# EAGLE board InkTime-pcb-Susai-Florian (EAGLE 9.7.0)
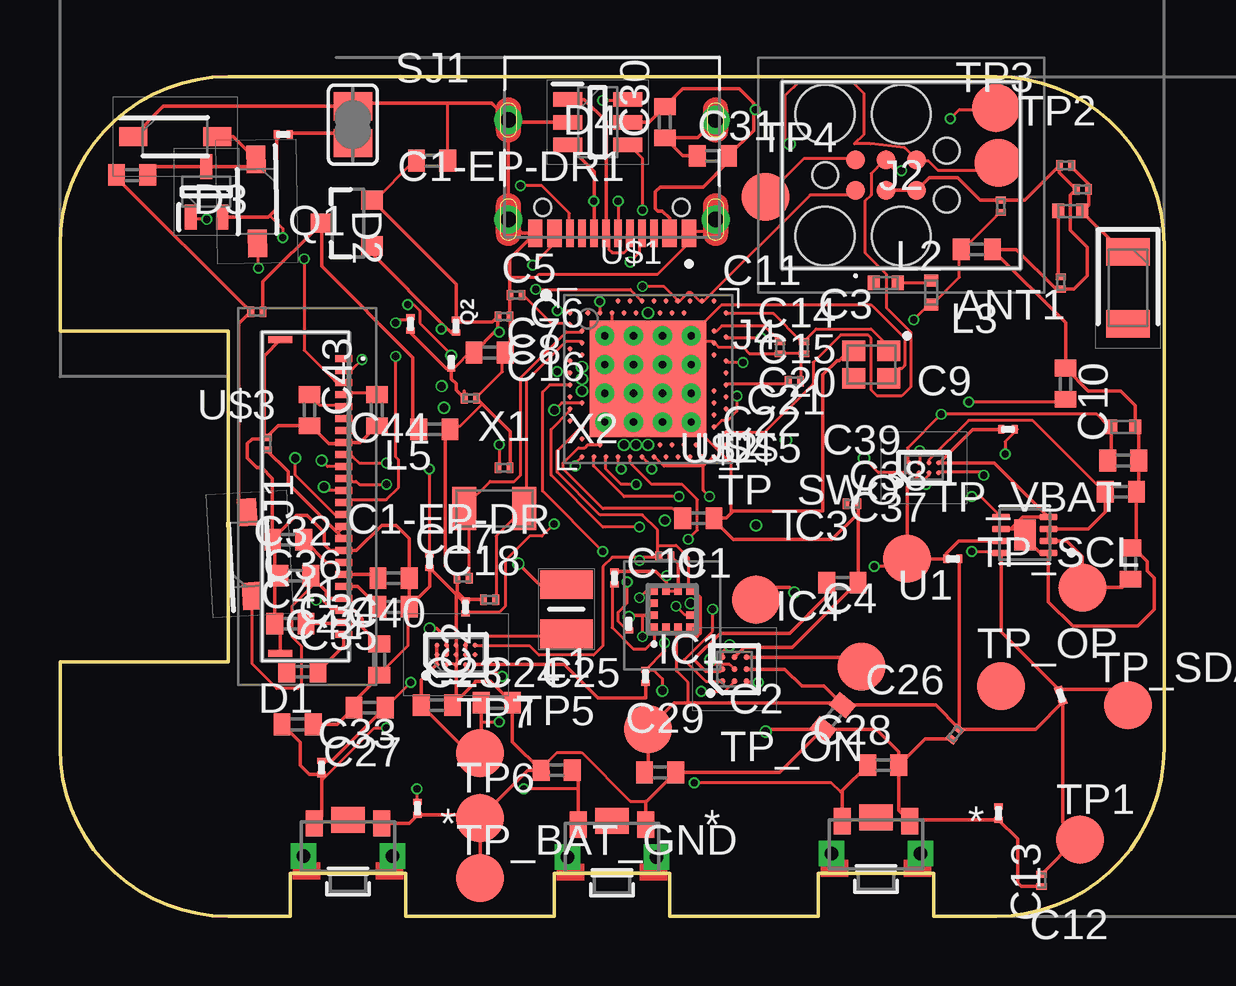
[diagram p0: board, top side]
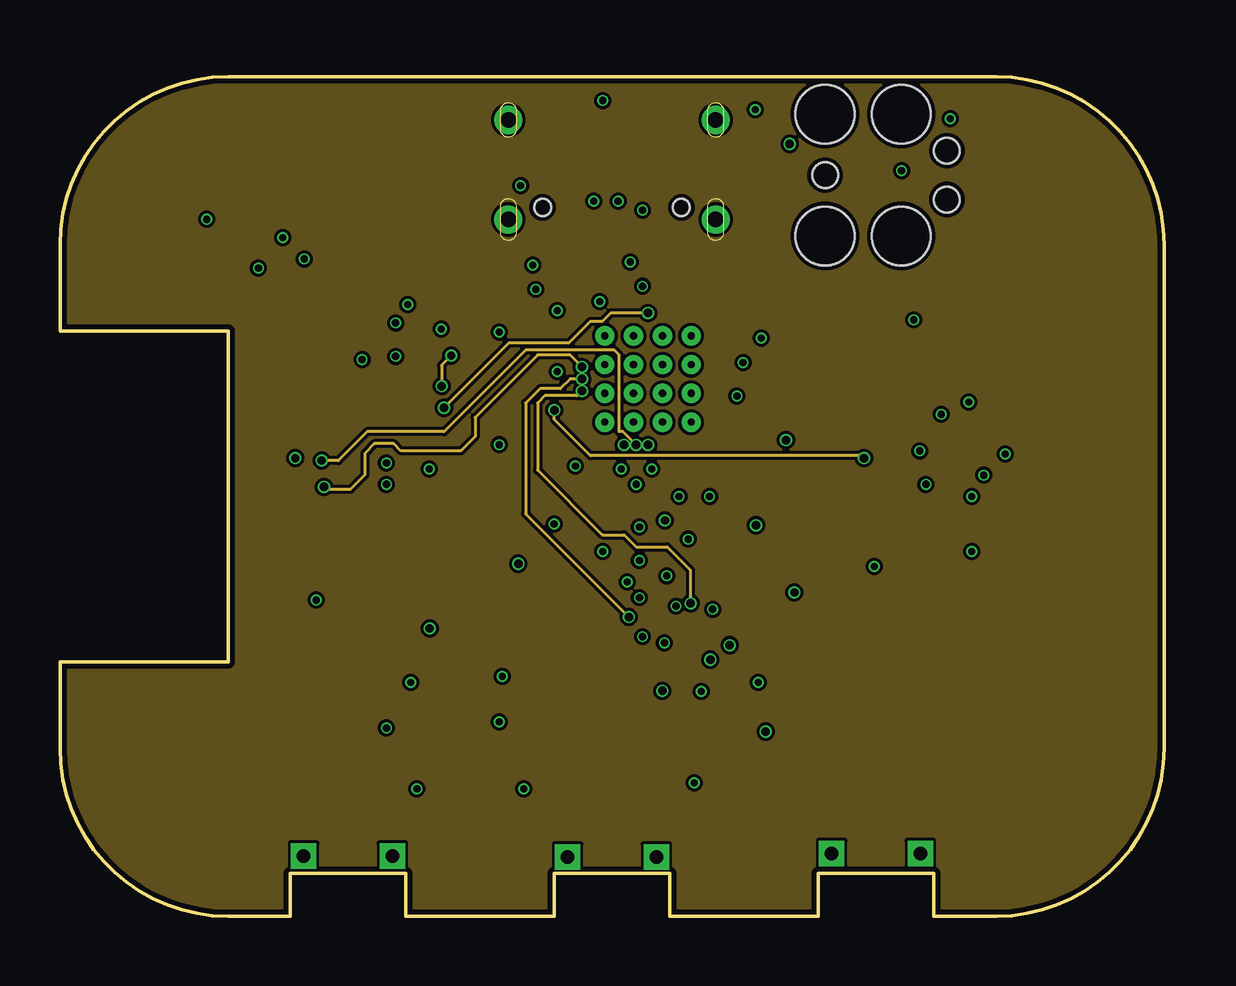
[diagram p1: board, inner layer Route2]
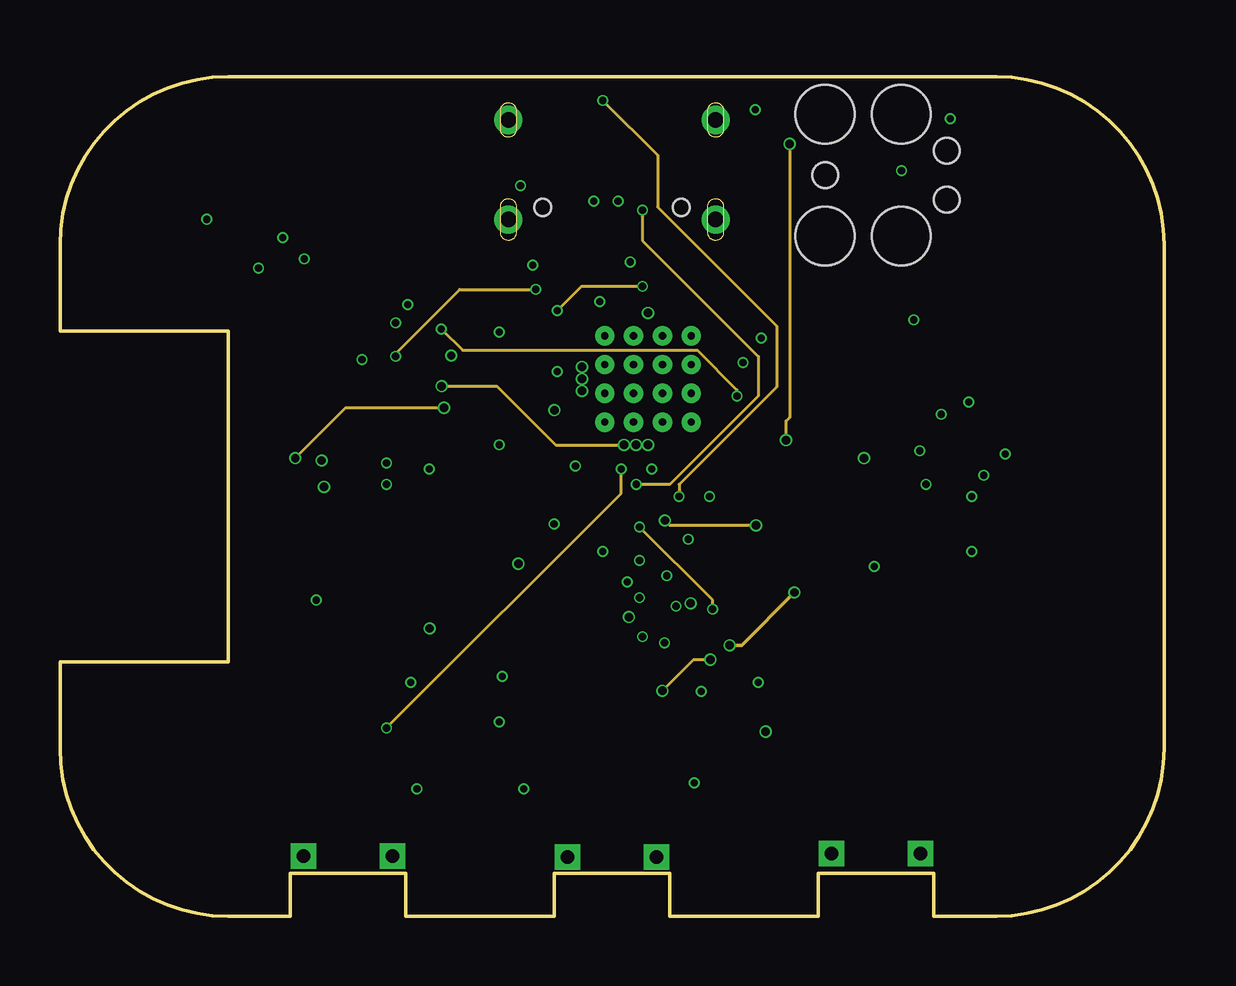
[diagram p2: board, inner layer Route15]
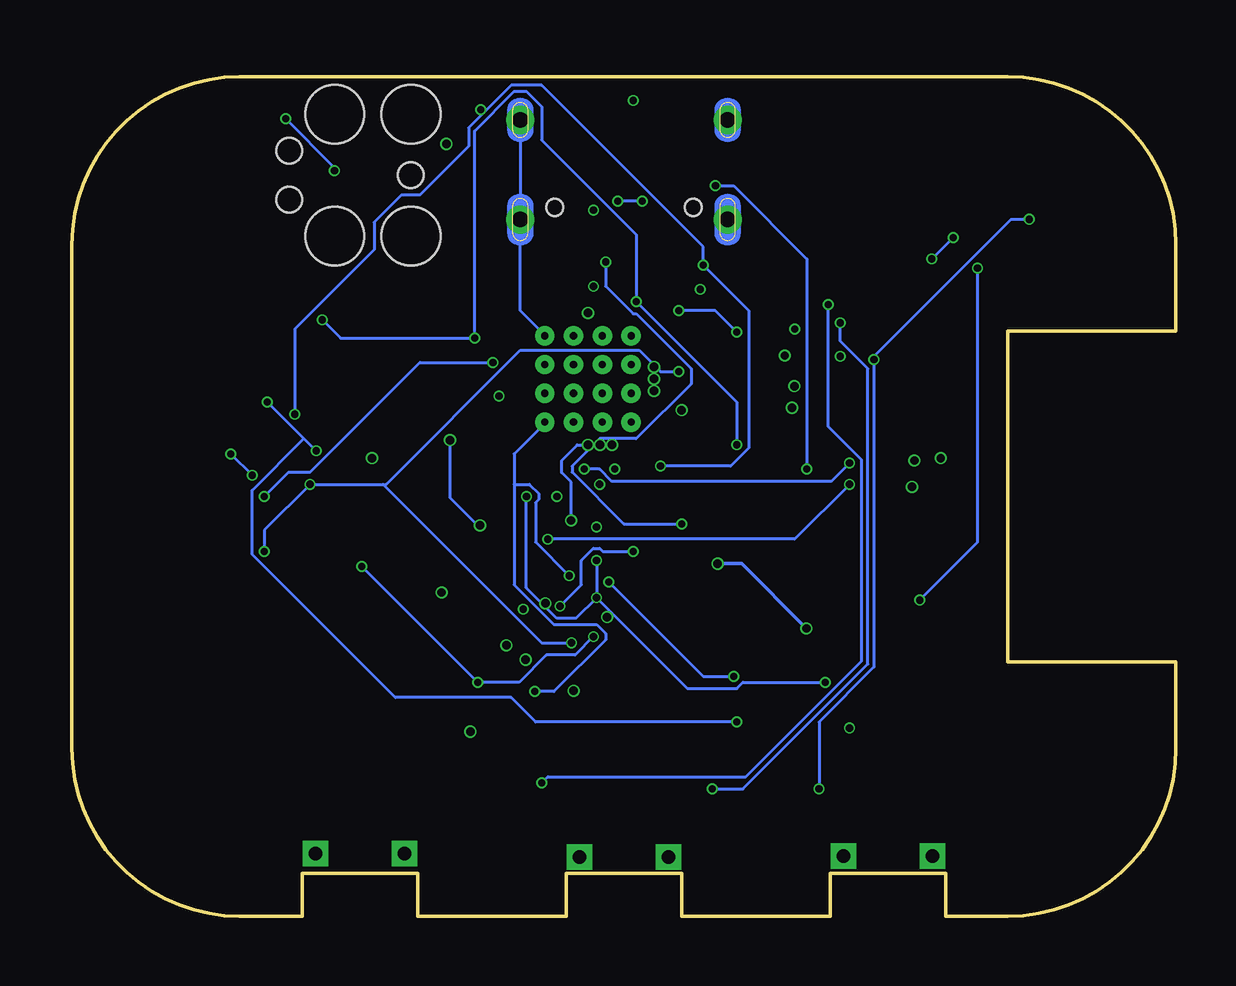
[diagram p3: board, bottom side, seen from below]

Size 46 x 35 mm. Coordinates in mm from the lower left corner, seen from the top.
Outline: 39,0 36.4,0 36.4,1.8 31.6,1.8 31.6,0 25.4,0 25.4,1.8 20.6,1.8 20.6,0 14.4,0 14.4,1.8 9.6,1.8 9.6,0 7,0 arc-90 0,7 0,10.6 7,10.6 7,24.4 0,24.4 0,28 arc-90 7,35 39,35 arc-90 46,28 46,7 arc-90 39,0
Copper layers (1*2*15*16): Top 0.035mm / dielectric 1mm / Route2 0.035mm / dielectric 0.15mm / Route15 0.035mm / dielectric 0.2mm / Bottom 0.035mm
Design rules "jlcpcb-2layers - Copy.dru *": minimum track width 5mil, minimum drill 0.3mm, track to track 5mil, track to pad 5mil, pad to pad 5mil, via to via 5mil, smd to smd 5mil, copper to edge 0.2mm, drill to drill 6mil, minimum pad ring 10mil, minimum via ring 3mil, stop-mask expansion 4mil, vias tented up to drill 0mil, thermal gap 10mil

## Footprints (pad centres in the part's own frame; a part is rotated, then mirrored left to right if it is on the bottom)
2450AT18B100E_ANTC3216X140N = smd 1.15 x 1.8: 1 -1.5,0; 2 1.5,0
NORDIC_NRF_3_RESC0201_L = smd 0.28 x 0.43: 1 -0.255,0; 2 0.255,0
ESP32_C6_LIBRARY_1_ESP32_WROVER_EAGLE-LTSPICE_C0402 = smd 0.7 x 0.9: 1 -0.65,0; 2 0.65,0
NORDIC_NRF_3_RESC0402_L = smd 0.5 x 0.6: 1 -0.5,0; 2 0.5,0
ESP32_C6_LIBRARY_5_SOD3716X135N = smd 1.15 x 0.8: 1 -1.75,0; 2 1.75,0
ESP32_C6_LIBRARY_3_SOT95P280X145-6N = smd 1.2 x 0.6: 1 -1.25,0.95; 2 -1.25,0; 3 -1.25,-0.95; 4 1.25,-0.95; 5 1.25,0; 6 1.25,0.95
BMA423_BMA423 = smd 0.3 x 0.35: 1 -0.75,-0.775; 2 -0.25,-0.775; 3 0.25,-0.775; 4 0.75,-0.775; 7 0.75,0.775; 8 0.25,0.775; 9 -0.25,0.775; 10 -0.75,0.775 | smd 0.35 x 0.3: 5 0.775,-0.25; 6 0.775,0.25; 11 -0.775,0.25; 12 -0.775,-0.25
RT6160AWSC_BGA15C40P3X5_140X230X60 = smd 0.216 x 0.216: A1 -0.4,0.8; A2 0,0.8; A3 0.4,0.8; B1 -0.4,0.4; B2 0,0.4; B3 0.4,0.4; C1 -0.4,0; C2 0,0; C3 0.4,0; D1 -0.4,-0.4; D2 0,-0.4; D3 0.4,-0.4; E1 -0.4,-0.8; E2 0,-0.8; E3 0.4,-0.8
BQ25180YBGR_BGA8C40P2X4_100X155X50 = smd 0.2 x 0.2: A1 -0.2,0.6; A2 0.2,0.6; B1 -0.2,0.2; B2 0.2,0.2; C1 -0.2,-0.2; C2 0.2,-0.2; D1 -0.2,-0.6; D2 0.2,-0.6
DRV2605YZFR_BGA9C50P3X3_144X144X62 = smd 0.25 x 0.25: A1 -0.5,0.5; A2 0,0.5; A3 0.5,0.5; B1 -0.5,0; B2 0,0; B3 0.5,0; C1 -0.5,-0.5; C2 0,-0.5; C3 0.5,-0.5
503480-2400_5034802400 = smd 0.3 x 0.7: 1 -5.75,1.525; 2 -5.25,1.525; 3 -4.75,1.525; 4 -4.25,1.525; 5 -3.75,1.525; 6 -3.25,1.525; 7 -2.75,1.525; 8 -2.25,1.525; 9 -1.75,1.525; 10 -1.25,1.525; 11 -0.75,1.525; 12 -0.25,1.525; 13 0.25,1.525; 14 0.75,1.525; 15 1.25,1.525; 16 1.75,1.525; 17 2.25,1.525; 18 2.75,1.525; 19 3.25,1.525; 20 3.75,1.525; 21 4.25,1.525; 22 4.75,1.525; 23 5.25,1.525; 24 5.75,1.525 | smd 0.3 x 1: MP1 -6.54,-1.125; MP2 6.54,-1.125
TC2030-IDC_TC2030IDC = smd 0.783 x 0.783: 1 -0.953,-0.635; 2 -0.953,0.635; 3 0.317,-0.635; 4 0.317,0.635; 5 1.588,-0.635; 6 1.588,0.635 | hole 2.451: -2.223,-2.54; -2.223,2.54; 0.952,-2.54; 0.952,2.54 | hole 1.067: -2.223,0; 2.857,-1.016; 2.857,1.016
KH-TYPE-C-16P_KINGHELM_KH-TYPE-C-16P = smd 0.6 x 1.15: A1_B12 -3.2,4.725; A4_B9 -2.4,4.725; A9_B4 2.4,4.725; A12_B1 3.2,4.725 | smd 0.3 x 1.15: A5 -1.25,4.725; A6 -0.25,4.725; A7 0.25,4.725; A8 1.25,4.725; B5 1.75,4.725; B6 0.75,4.725; B7 -0.75,4.725; B8 -1.75,4.725 | drill 0.65 pad 1.05: SH1 -4.32,0; SH2 4.32,0; SH3 -4.32,4.15; SH4 4.32,4.15 | hole 0.7: -2.89,3.65; 2.89,3.65
MLP2016SR47MT0S1_INDC2016X100N = smd 1.2 x 2.2: 1 -1.028,0; 2 1.028,0
NORDIC_NRF_2_RESC0402_L = smd 0.5 x 0.6: 1 -0.5,0; 2 0.5,0
NORDIC_NRF_2_RESC0201_L = smd 0.28 x 0.43: 1 -0.255,0; 2 0.255,0
ESP32_C6_LIBRARY_6_SOT65P210X110-3N = smd 1.05 x 0.5: 1 -1.05,0.65; 2 -1.05,-0.65; 3 1.05,0
ESP32_C6_LIBRARY_4_ESP32_C6_LIBRARY_4_ESP32_C6_LIBRARY_4_ESP32_C6_LIBRARY_4_ESP32_WROVER_SPARKFUN-DISCRETESEMI_SOT23-3 = smd 0.8 x 0.9: 1 -0.95,-1; 2 0.95,-1; 3 0,1.1
CPF0201D7K68C1_0201 = smd 0.35 x 0.25: 1 0,0.275; 2 0,-0.275
ESP32_C6_LIBRARY_7_JUMPER_SJ = smd 1.168 x 1.6: 1 -0.762,0; 2 0.762,0
2025-10-22_07-23-44_LIBRARY_SW_EVP-AKE31A_PAN = smd 0.711 x 1.092: 1 -1.4,-0.972; 2 1.4,-0.972 | drill 0.559 pad 0.914 square: 3 -1.848,0.381; 4 1.848,0.381 | smd 1.397 x 1.092: 5 0,-1.124
HECTOR_WATCH_1_TP20R = smd 2 x 2: TP 0,0
ESP32_C6_LIBRARY_SON50P200X200X80-9N = smd 0.76 x 0.27: 1 -0.985,0.75; 2 -0.985,0.25; 3 -0.985,-0.25; 4 -0.985,-0.75; 5 0.985,-0.75; 6 0.985,-0.25; 7 0.985,0.25; 8 0.985,0.75 | smd 0.9 x 1.3: 9 0,0
NORDIC_NRF_4_AQFN50P700X700X85_HS-74N = smd 4.85 x 4.85: P$74 0,0 | drill 0.3 pad 0.6: P$75 -1.8,1.8; P$76 -0.6,1.8; P$77 0.6,1.8; P$78 1.8,1.8; P$79 -1.8,0.6; P$80 -0.6,0.6; P$81 0.6,0.6; P$82 1.8,0.6; P$83 -1.8,-0.6; P$84 -0.6,-0.6; P$85 0.6,-0.6; P$86 1.8,-0.6; P$87 -1.8,-1.8; P$88 -0.6,-1.8; P$89 0.6,-1.8; P$90 1.8,-1.8 | smd 0.2 x 0.2: P$A8 -1.25,3.25; P$A10 -0.75,3.25; P$A12 -0.25,3.25; P$A14 0.25,3.25; P$A16 0.75,3.25; P$A18 1.25,3.25; P$A20 1.75,3.25; P$A22 2.25,3.25; P$A23 2.75,3.25; P$AA24 3.25,-2.25; P$AB2 -2.75,-2.5; P$AC5 -2,-2.75; P$AC9 -1,-2.75; P$AC11 -0.5,-2.75; P$AC13 0,-2.75; P$AC15 0.5,-2.75; P$AC17 1,-2.75; P$AC19 1.5,-2.75; P$AC21 2,-2.75; P$AC24 3.25,-2.75; P$AD2 -2.75,-3.25; P$AD4 -2.25,-3.25; P$AD6 -1.75,-3.25; P$AD8 -1.25,-3.25; P$AD10 -0.75,-3.25; P$AD12 -0.25,-3.25; P$AD14 0.25,-3.25; P$AD16 0.75,-3.25; P$AD18 1.25,-3.25; P$AD20 1.75,-3.25; P$AD22 2.25,-3.25; P$AD23 2.75,-3.25; P$B1 -3.25,2.75; P$B3 -2.5,2.75; P$B5 -2,2.75; P$B7 -1.5,2.75; P$B9 -1,2.75; P$B11 -0.5,2.75; P$B13 0,2.75; P$B15 0.5,2.75; P$B17 1,2.75; P$B19 1.5,2.75; P$B24 3.25,2.75; P$C1 -3.25,2.25; P$D2 -2.75,2; P$D23 2.75,2; P$E24 3.25,1.75; P$F2 -2.75,1.5; P$F23 2.75,1.5; P$G1 -3.25,1.25; P$H2 -2.75,1; P$H23 2.75,1; P$J1 -3.25,0.75; P$J24 3.25,0.75; P$K2 -2.75,0.5; P$L1 -3.25,0.25; P$L24 3.25,0.25; P$M2 -2.75,0; P$N1 -3.25,-0.25; P$N24 3.25,-0.25; P$P2 -2.75,-0.5; P$P23 2.75,-0.5; P$R1 -3.25,-0.75; P$R24 3.25,-0.75; P$T2 -2.75,-1; P$T23 2.75,-1; P$U1 -3.25,-1.25; P$U24 3.25,-1.25; P$V23 2.75,-1.5; P$W1 -3.25,-1.75; P$W24 3.25,-1.75; P$Y2 -2.75,-2; P$Y23 2.75,-2
NORDIC_NRF_BT-XTAL_2016_N = smd 0.95 x 0.85: 1 -0.725,-0.575; 2 0.725,-0.575; 3 0.725,0.575; 4 -0.725,0.575
NORDIC_NRF_1_XTAL_3215_N = smd 1 x 1.8: 1 -1.25,0; 2 1.25,0

## Placement (x,y rotation side)
ANT1  2450AT18B100E_2450AT18B100E  [2450AT18B100E_ANTC3216X140N]  44.5,26.2 270 top
C1  1pF  [NORDIC_NRF_3_RESC0201_L]  42.6,30.3 180 top
C1-EP-DR  10uF  [ESP32_C6_LIBRARY_1_ESP32_WROVER_EAGLE-LTSPICE_C0402]  15.6,20.3 0 top
C1-EP-DR1  4.7uF/25V  [ESP32_C6_LIBRARY_1_ESP32_WROVER_EAGLE-LTSPICE_C0402]  3,30.9 180 top
C2  0.1uF  [ESP32_C6_LIBRARY_1_ESP32_WROVER_EAGLE-LTSPICE_C0402]  32.2,8.3 230.9 top
C3  1pF  [NORDIC_NRF_3_RESC0201_L]  41.7,26.4 270 top
C4  1uF  [ESP32_C6_LIBRARY_1_ESP32_WROVER_EAGLE-LTSPICE_C0402]  32.6,13.9 0 top
C5  100nF  [NORDIC_NRF_3_RESC0201_L]  19,25.9 180 top
C6  4.7µF  [ESP32_C6_LIBRARY_1_ESP32_WROVER_EAGLE-LTSPICE_C0402]  17.9,23.5 0 top
C7  100nF  [NORDIC_NRF_3_RESC0201_L]  17.1,21.6 0 top
C8  100nF  [NORDIC_NRF_3_RESC0201_L]  18.5,25 0 top
C9  820pF  [NORDIC_NRF_3_RESC0201_L]  30.6,22.3 0 top
C10  N.C.  [NORDIC_NRF_3_RESC0201_L]  39.2,29.6 90 top
C11  100pF  [NORDIC_NRF_3_RESC0201_L]  30,23.7 270 top
C12  100nF  [NORDIC_NRF_3_RESC0201_L]  40.9,1.5 270 top
C13  N.C.  [NORDIC_NRF_3_RESC0201_L]  37.3,7.6 232.1 top
C14  4.7µF  [ESP32_C6_LIBRARY_1_ESP32_WROVER_EAGLE-LTSPICE_C0402]  15.5,31.5 0 top
C15  1.0µF  [ESP32_C6_LIBRARY_1_ESP32_WROVER_EAGLE-LTSPICE_C0402]  38.2,27.8 0 top
C16  47nF  [NORDIC_NRF_3_RESC0201_L]  18.5,18.7 0 top
C17  12pF  [NORDIC_NRF_3_RESC0201_L]  16.8,14.1 0 top
C18  12pF  [NORDIC_NRF_3_RESC0201_L]  17.9,13.2 0 top
C19  100nF  [NORDIC_NRF_3_RESC0201_L]  25.2,15 0 top
C20  4.7µF  [ESP32_C6_LIBRARY_1_ESP32_WROVER_EAGLE-LTSPICE_C0402]  26.6,16.6 0 top
C21  4.7µF  [NORDIC_NRF_3_RESC0402_L]  44.3,20.4 0 top
C22  N.C.  [NORDIC_NRF_3_RESC0201_L]  41.9,31.3 180 top
C23  0.1uF  [ESP32_C6_LIBRARY_1_ESP32_WROVER_EAGLE-LTSPICE_C0402]  15.7,8.8 0 top
C24  10uF  [ESP32_C6_LIBRARY_1_ESP32_WROVER_EAGLE-LTSPICE_C0402]  18.2,8.9 0 top
C25  22uF  [ESP32_C6_LIBRARY_1_ESP32_WROVER_EAGLE-LTSPICE_C0402]  25,6 0 top
C26  0.1uF  [ESP32_C6_LIBRARY_1_ESP32_WROVER_EAGLE-LTSPICE_C0402]  44.6,14.7 90 top
C27  1uF  [ESP32_C6_LIBRARY_1_ESP32_WROVER_EAGLE-LTSPICE_C0402]  9.9,8 0 top
C28  1uF  [ESP32_C6_LIBRARY_1_ESP32_WROVER_EAGLE-LTSPICE_C0402]  34.3,6.3 0 top
C29  1uF  [ESP32_C6_LIBRARY_1_ESP32_WROVER_EAGLE-LTSPICE_C0402]  20.69,6.09 180.6 top
C30  4.7uF  [ESP32_C6_LIBRARY_1_ESP32_WROVER_EAGLE-LTSPICE_C0402]  25.2,33.1 90 top
C31  0.1uF  [ESP32_C6_LIBRARY_1_ESP32_WROVER_EAGLE-LTSPICE_C0402]  27.2,31.7 0 top
C32  1uF/50V  [ESP32_C6_LIBRARY_1_ESP32_WROVER_EAGLE-LTSPICE_C0402]  9.5,15.7 0 top
C33  22uF  [ESP32_C6_LIBRARY_1_ESP32_WROVER_EAGLE-LTSPICE_C0402]  12.9,8.7 180 top
C34  1uF/50V  [ESP32_C6_LIBRARY_1_ESP32_WROVER_EAGLE-LTSPICE_C0402]  13.9,14.1 180 top
C35  1uF/50V  [ESP32_C6_LIBRARY_1_ESP32_WROVER_EAGLE-LTSPICE_C0402]  13.9,12.9 180 top
C36  1uF/50V  [ESP32_C6_LIBRARY_1_ESP32_WROVER_EAGLE-LTSPICE_C0402]  9.8,14.2 0 top
C37  1uF  [ESP32_C6_LIBRARY_1_ESP32_WROVER_EAGLE-LTSPICE_C0402]  44.2,17.7 0 top
C38  1uF  [ESP32_C6_LIBRARY_1_ESP32_WROVER_EAGLE-LTSPICE_C0402]  44.3,19 0 top
C39  10uF  [ESP32_C6_LIBRARY_1_ESP32_WROVER_EAGLE-LTSPICE_C0402]  41.9,22.2 90 top
C40  1uF/50V  [ESP32_C6_LIBRARY_1_ESP32_WROVER_EAGLE-LTSPICE_C0402]  13.3,10.7 90 top
C41  1uF/50V  [ESP32_C6_LIBRARY_1_ESP32_WROVER_EAGLE-LTSPICE_C0402]  9.6,12.2 0 top
C42  1uF/50V  [ESP32_C6_LIBRARY_1_ESP32_WROVER_EAGLE-LTSPICE_C0402]  10.1,10.2 0 top
C43  1uF/50V  [ESP32_C6_LIBRARY_1_ESP32_WROVER_EAGLE-LTSPICE_C0402]  13.2,21.1 90 top
C44  1uF/50V  [ESP32_C6_LIBRARY_1_ESP32_WROVER_EAGLE-LTSPICE_C0402]  10.4,21.1 90 top
D1  ESP32_C6_LIBRARY_5_MBR0530  [ESP32_C6_LIBRARY_5_SOD3716X135N]  7.9,15.1 93.3 top
D2  ESP32_C6_LIBRARY_5_MBR0530  [ESP32_C6_LIBRARY_5_SOD3716X135N]  8.2,29.8 271 top
D3  ESP32_C6_LIBRARY_5_MBR0530  [ESP32_C6_LIBRARY_5_SOD3716X135N]  4.8,32.5 0 top
D4  ESP32_C6_LIBRARY_3_USBLC6-2SC6Y  [ESP32_C6_LIBRARY_3_SOT95P280X145-6N]  22.4,33.1 0 top
IC1  BMA423_BMA423  [BMA423_BMA423]  25.5,12.8 0 top
IC2  RT6160AWSC_RT6160AWSC  [RT6160AWSC_BGA15C40P3X5_140X230X60]  16.5,10.9 90 top
IC3  BQ25180YBGR_BQ25180YBGR  [BQ25180YBGR_BGA8C40P2X4_100X155X50]  36,18.7 90 top
IC4  DRV2605YZFR_DRV2605YZFR  [DRV2605YZFR_BGA9C50P3X3_144X144X62]  28.1,10.3 90 top
J1  503480-2400_503480-2400  [503480-2400_5034802400]  10.3,17.5 270 top
J2  TC2030-IDC_TC2030-IDC  [TC2030-IDC_TC2030IDC]  34.1,30.9 0 top
J4  KH-TYPE-C-16P_KH-TYPE-C-16P  [KH-TYPE-C-16P_KINGHELM_KH-TYPE-C-16P]  23,33.2 180 top
L1  MLP2016SR47MT0S1_FTC252012SR47MBCA  [MLP2016SR47MT0S1_INDC2016X100N]  21.1,12.8 270 top
L2  10µH  [NORDIC_NRF_2_RESC0402_L]  34.4,26.4 0 top
L3  10µH  [NORDIC_NRF_2_RESC0402_L]  36.3,26 270 top
L5  68uH  [NORDIC_NRF_2_RESC0201_L]  8.2,25.2 180 top
Q1  ESP32_C6_LIBRARY_6_SI1308EDL-T1-GE3  [ESP32_C6_LIBRARY_6_SOT65P210X110-3N]  6.1,30.2 90 top
Q2  20V/4.2A/52mΩ/1.4W  [ESP32_C6_LIBRARY_4_ESP32_C6_LIBRARY_4_ESP32_C6_LIBRARY_4_ESP32_C6_LIBRARY_4_ESP32_WROVER_SPARKFUN-DISCRETESEMI_SOT23-3]  12,28.9 90 top
R1  0  [CPF0201D7K68C1_0201]  24.4,10 0 top
R2  0  [CPF0201D7K68C1_0201]  23.7,12.2 0 top
R3  0  [CPF0201D7K68C1_0201]  23.1,14.1 0 top
R4  3K3  [CPF0201D7K68C1_0201]  37.2,14.9 270 top
R5  3K3  [CPF0201D7K68C1_0201]  41.7,9.2 198.5 top
R6  0.47  [CPF0201D7K68C1_0201]  9.3,32.6 270 top
R7  2.2  [CPF0201D7K68C1_0201]  39.1,4.3 180 top
R8  10K  [CPF0201D7K68C1_0201]  14.9,4.5 180 top
R9  10K  [CPF0201D7K68C1_0201]  39.5,20.3 90 top
R10  10K  [CPF0201D7K68C1_0201]  10.9,6.2 180 top
R11  10K  [CPF0201D7K68C1_0201]  16.3,23.1 0 top
R12  10K  [CPF0201D7K68C1_0201]  14.6,24.7 0 top
R13  10K  [CPF0201D7K68C1_0201]  16.9,12.9 0 top
R14  10K  [CPF0201D7K68C1_0201]  15.4,14.8 0 top
R16  10K  [CPF0201D7K68C1_0201]  16.5,24.6 180 top
SJ1  0  [ESP32_C6_LIBRARY_7_JUMPER_SJ]  12.2,33 270 top
SW1  2025-10-22_07-23-44_LIBRARY_EVP-AKE31ASW_EVP-AKE31A_PAN  [2025-10-22_07-23-44_LIBRARY_SW_EVP-AKE31A_PAN]  12,2.9 180 top
SW2  2025-10-22_07-23-44_LIBRARY_EVP-AKE31ASW_EVP-AKE31A_PAN  [2025-10-22_07-23-44_LIBRARY_SW_EVP-AKE31A_PAN]  34,3 180 top
SW3  2025-10-22_07-23-44_LIBRARY_EVP-AKE31ASW_EVP-AKE31A_PAN  [2025-10-22_07-23-44_LIBRARY_SW_EVP-AKE31A_PAN]  23,2.85 180 top
TP1  HECTOR_WATCH_1_TPTP20R  [HECTOR_WATCH_1_TP20R]  42.5,3.2 0 top
TP2  HECTOR_WATCH_1_TPTP20R  [HECTOR_WATCH_1_TP20R]  39.1,31.4 0 top
TP3  HECTOR_WATCH_1_TPTP20R  [HECTOR_WATCH_1_TP20R]  39,33.7 0 top
TP4  HECTOR_WATCH_1_TPTP20R  [HECTOR_WATCH_1_TP20R]  29.4,30 180 top
TP5  HECTOR_WATCH_1_TPTP20R  [HECTOR_WATCH_1_TP20R]  24.5,7.8 0 top
TP6  HECTOR_WATCH_1_TPTP20R  [HECTOR_WATCH_1_TP20R]  17.5,4.1 0 top
TP7  HECTOR_WATCH_1_TPTP20R  [HECTOR_WATCH_1_TP20R]  17.5,6.8 0 top
TP_BAT_GND  HECTOR_WATCH_1_TPTP20R  [HECTOR_WATCH_1_TP20R]  17.5,1.6 0 top
TP_ON  HECTOR_WATCH_1_TPTP20R  [HECTOR_WATCH_1_TP20R]  33.4,10.4 0 top
TP_OP  HECTOR_WATCH_1_TPTP20R  [HECTOR_WATCH_1_TP20R]  29,13.2 0 top
TP_SCL  HECTOR_WATCH_1_TPTP20R  [HECTOR_WATCH_1_TP20R]  35.3,14.9 0 top
TP_SDA  HECTOR_WATCH_1_TPTP20R  [HECTOR_WATCH_1_TP20R]  44.5,8.8 0 top
TP_SWO  HECTOR_WATCH_1_TPTP20R  [HECTOR_WATCH_1_TP20R]  39.2,9.6 0 top
TP_VBAT  HECTOR_WATCH_1_TPTP20R  [HECTOR_WATCH_1_TP20R]  42.6,13.7 0 top
U1  ESP32_C6_LIBRARY_MAX17048G+T10  [ESP32_C6_LIBRARY_SON50P200X200X80-9N]  40.2,15.9 180 top
U$1  NORDIC_NRF_4_NRF52840_QF  [NORDIC_NRF_4_AQFN50P700X700X85_HS-74N]  24.5,22.4 0 top
U$2  3.9nH  [NORDIC_NRF_2_RESC0402_L]  42.1,29.4 0 top
U$3  1uF/50V  [NORDIC_NRF_3_RESC0201_L]  8.6,19.7 270 top
U$4  12pF  [NORDIC_NRF_3_RESC0201_L]  31,23.7 270 top
U$5  12pF  [NORDIC_NRF_3_RESC0201_L]  33,17.2 0 top
X1  32MHz  [NORDIC_NRF_BT-XTAL_2016_N]  33.8,23 180 top
X2  32.768kHz  [NORDIC_NRF_1_XTAL_3215_N]  18.1,17 0 top

## Library data of the parts
ANT1 = dan-tudose-lib; ARROW_PART_NUMBER: 2450AT18B100E; ARROW_PRICE-STOCK: https://www.arrow.com/en/products/2450at18b100e/johanson-dielectrics?utm_currency=USD&region=nac; DESCRIPTION: Antennas 2.45GHz ANTENNA; HEIGHT: 1.4mm; MANUFACTURER_NAME: JOHANSON TECHNOLOGY; MANUFACTURER_PART_NUMBER: 2450AT18B100E; MOUSER_PART_NUMBER: 609-2450AT18B100E; MOUSER_PRICE-STOCK: https://www.mouser.co.uk/ProductDetail/Johanson-Technology/2450AT18B100E?qs=yCnrNFeXz%252Bh5MFsFIXGZGA%3D%3D
C1 C3 C5 C7-C13 C16-C19 C21 C22 L2 L3 L5 R1-R14 R16 SJ1 TP1-TP7 TP_BAT_GND TP_ON TP_OP TP_SCL TP_SDA TP_SWO TP_VBAT U$1-U$5 X1 X2 = dan-tudose-lib
C1-EP-DR C1-EP-DR1 C2 C4 C6 C14 C15 C20 C23-C44 = dan-tudose-lib; SPICEMODEL: NONE; SPICEPREFIX: C
D1-D3 = dan-tudose-lib; AVAILABILITY: In Stock; CHECK_PRICES: https://www.snapeda.com/parts/MBR0530/Onsemi/view-part/?ref=eda; DESCRIPTION: Diode Schottky 30 V 500mA Surface Mount SOD-123; MF: ON Semiconductor; MP: MBR0530; PACKAGE: SOD-123-2 ON Semiconductor; PRICE: None; PURCHASE-URL: https://www.snapeda.com/api/url_track_click_mouser/?unipart_id=179458&manufacturer=ON Semiconductor&part_name=MBR0530&search_term=None; SNAPEDA_LINK: https://www.snapeda.com/parts/MBR0530/Onsemi/view-part/?ref=snap
D4 = dan-tudose-lib; AVAILABILITY: In Stock; CHECK_PRICES: https://www.snapeda.com/parts/USBLC6-2SC6Y/STMicroelectronics/view-part/?ref=eda; DESCRIPTION: 17V Clamp 5A (8/20µs) Ipp Tvs Diode Surface Mount SOT-23-6; MF: STMicroelectronics; MP: USBLC6-2SC6Y; PACKAGE: SOT-23-6 STMicroelectronics; PRICE: None; SNAPEDA_LINK: https://www.snapeda.com/parts/USBLC6-2SC6Y/STMicroelectronics/view-part/?ref=snap
IC1 = dan-tudose-lib; ARROW_PART_NUMBER: BMA423; ARROW_PRICE-STOCK: https://www.arrow.com/en/products/bma423/bosch; DESCRIPTION: Accelerometers Triaxial low-g 12bit Acceleration Sensor; HEIGHT: 1mm; MANUFACTURER_NAME: BOSCH; MANUFACTURER_PART_NUMBER: BMA423; MOUSER_PART_NUMBER: 262-BMA423; MOUSER_PRICE-STOCK: https://www.mouser.co.uk/ProductDetail/Bosch-Sensortec/BMA423?qs=HXFqYaX1Q2xC%252BSgeGoX3mg%3D%3D
IC2 = dan-tudose-lib; DESCRIPTION: Buck-Boost Regulator Positive Output Step-Up/Step-Down I2C DC-DC Controller IC 15-WL-CSP (BSC) (1.4x2.3); HEIGHT: 0.6mm; MANUFACTURER_NAME: RICHTEK; MANUFACTURER_PART_NUMBER: RT6160AWSC; MOUSER_PART_NUMBER: 835-RT6160AWSC; MOUSER_PRICE-STOCK: https://www.mouser.co.uk/ProductDetail/Richtek/RT6160AWSC?qs=amGC7iS6iy%2FLd9PSoixZXQ%3D%3D
IC3 = dan-tudose-lib; ARROW_PART_NUMBER: BQ25180YBGR; ARROW_PRICE-STOCK: https://www.arrow.com/en/products/bq25180ybgr/texas-instruments?utm_currency=USD&region=nac; DESCRIPTION: Charger IC Lithium Ion/Polymer, Lithium Iron Phosphate 8-DSBGA (1.6x1.1); HEIGHT: 0.5mm; MANUFACTURER_NAME: Texas Instruments; MANUFACTURER_PART_NUMBER: BQ25180YBGR; MOUSER_PART_NUMBER: 595-BQ25180YBGR; MOUSER_PRICE-STOCK: https://www.mouser.co.uk/ProductDetail/Texas-Instruments/BQ25180YBGR?qs=doiCPypUmgEWjAK%252BJAX6Tw%3D%3D
IC4 = dan-tudose-lib; ARROW_PART_NUMBER: DRV2605YZFR; ARROW_PRICE-STOCK: https://www.arrow.com/en/products/drv2605yzfr/texas-instruments?region=nac; DESCRIPTION: Haptic Driver for ERM/LRA with Built-In Library and Smart Loop Architecture; HEIGHT: 0.625mm; MANUFACTURER_NAME: Texas Instruments; MANUFACTURER_PART_NUMBER: DRV2605YZFR
J1 = dan-tudose-lib; DESCRIPTION: FFC & FPC Connectors 0.5mm FPC RA SMT Dual Contact 24Ckt; HEIGHT: 1.87mm; MANUFACTURER_NAME: Molex; MANUFACTURER_PART_NUMBER: 503480-2400; MOUSER_PART_NUMBER: 538-503480-2400; MOUSER_PRICE-STOCK: https://www.mouser.co.uk/ProductDetail/Molex/503480-2400?qs=OAhjpuo3Vu7efIoxFh9AOw%3D%3D
J2 = dan-tudose-lib; DESCRIPTION: CABLE ADAPTER 6 POS; HEIGHT: 19mm; MANUFACTURER_NAME: Tag Connect; MANUFACTURER_PART_NUMBER: TC2030-IDC
J4 = dan-tudose-lib; AVAILABILITY: Not in stock; CHECK_PRICES: https://www.snapeda.com/parts/KH-TYPE-C-16P/Kinghelm/view-part/?ref=eda; MF: kinghelm; MP: KH-TYPE-C-16P; PACKAGE: None; PRICE: None; SNAPEDA_LINK: https://www.snapeda.com/parts/KH-TYPE-C-16P/Kinghelm/view-part/?ref=snap
L1 = dan-tudose-lib; DESCRIPTION: SMD / SMT Inductors (Coils), L=0.47?H, L x W x T :; HEIGHT: 1mm; JLCPCB: https://jlcpcb.com/partdetail/6763488-FTC252012SR47MBCA/C5832368; MANUFACTURER_NAME: TDK; MANUFACTURER_PART_NUMBER: FTC252012SR47MBCA
Q1 = dan-tudose-lib; AVAILABILITY: In Stock; CHECK_PRICES: https://www.snapeda.com/parts/SI1308EDL-T1-GE3/Vishay+Siliconix/view-part/?ref=eda; DESCRIPTION: Si1308EDL-T1-GE3 N-channel MOSFET Transistor, 1.5 A, 30 V, 3-Pin SC-70 | Siliconix / Vishay SI1308EDL-T1-GE3; MF: Vishay Siliconix; MP: SI1308EDL-T1-GE3; PACKAGE: SOT-323 Vishay Semiconductor; PRICE: None; PURCHASE-URL: https://www.snapeda.com/api/url_track_click_mouser/?unipart_id=274603&manufacturer=Vishay Siliconix&part_name=SI1308EDL-T1-GE3&search_term=None; SNAPEDA_LINK: https://www.snapeda.com/parts/SI1308EDL-T1-GE3/Vishay+Siliconix/view-part/?ref=snap
Q2 = dan-tudose-lib; PROD_ID: TRAN-14388
SW1-SW3 = dan-tudose-lib; COPYRIGHT: Copyright (C) 2025 Ultra Librarian. All rights reserved.; DIGI-KEY_PART_NUMBER_1: P123437TR-ND; DIGI-KEY_PART_NUMBER_2: P123437CT-ND; DIGI-KEY_PART_NUMBER_3: P123437DKR-ND; MANUFACTURER_NAME: Panasonic; MANUFACTURER_PART_NUMBER: EVP-AKE31A
U1 = dan-tudose-lib; AVAILABILITY: In Stock; CHECK_PRICES: https://www.snapeda.com/parts/MAX17048G+T10/Analog+Devices/view-part/?ref=eda; DESCRIPTION: 3µA 1-Cell/2-Cell Fuel Gauge with ModelGauge; MF: Analog Devices; MP: MAX17048G+T10; PACKAGE: TDFN-8 Maxim; PRICE: None; PURCHASE-URL: https://www.snapeda.com/api/url_track_click_mouser/?unipart_id=329239&manufacturer=Analog Devices&part_name=MAX17048G+T10&search_term=None; SNAPEDA_LINK: https://www.snapeda.com/parts/MAX17048G+T10/Analog+Devices/view-part/?ref=snap

## Nets
3V3: C2.1 C12.1 C13.1 C19.1 C25.1 C33.1 IC1.3 IC1.7 IC1.10 IC2.E3 IC4.C2 R4.1 R5.1 R10.2 TP1.TP TP5.TP U$1.P$AD14 U$1.P$AD23 U$1.P$Y2
ALERT: U1.5 U$1.P$J24
D+: D4.4 U$1.P$AD6
D-: D4.6 U$1.P$AD4
DEC3: C11.1 U$1.P$D23
DEC4_6: C10.1 C15.1 C16.1 L3.2 U$1.P$B5 U$1.P$E24
DN: D4.1 J4.A7 J4.B7
DP: D4.3 J4.A6 J4.B6
EPD: J1.15 J1.16 U$3.2
EPD_3V3: C1-EP-DR.1 L5.1 Q2.3
EPD_BUSY: J1.9 U$1.P$AD12
EPD_CS: J1.12 U$1.P$K2
EPD_DC: J1.11 U$1.P$AD10
EPD_RST: J1.10 U$1.P$AC11
GDR: J1.2 Q1.1 R8.2
GND: C1-EP-DR.2 C2.2 C4.2 C5.2 C6.2 C7.2 C8.2 C9.2 C11.2 C12.2 C13.2 C14.2 C16.2 C17.1 C18.1 C19.2 C20.2 C23.2 C24.2 C25.2 C27.2 C28.2 C29.2 C30.1 C31.1 C32.1 C33.2 C34.1 C35.1 C36.1 C40.1 C41.1 C43.1 C44.1 D3.1 D4.2 IC1.8 IC1.9 IC2.B1 IC2.C1 IC2.C2 IC2.C3 IC4.B1 IC4.B3 J1.8 J1.17 J1.MP1 J1.MP2 J4.A1_B12 J4.A12_B1 J4.SH1 J4.SH2 J4.SH3 J4.SH4 R3.1 R7.1 R8.1 R13.1 R14.2 SJ1.1 SW1.1 SW2.1 SW3.1 TP6.TP TP_BAT_GND.TP U$1.P$74 U$1.P$75 U$1.P$76 U$1.P$77 U$1.P$78 U$1.P$79 U$1.P$80 U$1.P$81 U$1.P$82 U$1.P$83 U$1.P$84 U$1.P$85 U$1.P$86 U$1.P$87 U$1.P$88 U$1.P$89 U$1.P$90 U$1.P$B7 U$1.P$F23 U$3.1 U$4.2 U$5.2 X1.2 X1.4
GND3: IC1.1 R3.2
HAPTIC_EN: IC4.A1 U$1.P$U1
IMU_INT1: IC1.5 U$1.P$N1
IMU_INT2: IC1.6 U$1.P$P2
LX1: IC2.B2 IC2.B3 L1.1
LX2: IC2.D2 IC2.D3 L1.2
MOSI: J1.14 U$1.P$B13
N$1: C5.1 U$1.P$C1
N$3: C20.1 U$1.P$AC5
N$4: ANT1.1 C1.1 C22.1 U$2.2
N$5: C3.1 U$2.1
N$6: L2.2 L3.1
N$10: IC2.D1 R2.2
N$11: C1-EP-DR1.2 D1.2 L5.2
N$12: IC2.E1 R1.2
N$13: C1-EP-DR1.1 D2.1 D3.2 Q1.3
N$14: C9.1 U$1.P$N24
N$16: IC3.D1 R9.2
N$21: U$1.P$B24 U$4.1 X1.1
N$22: R6.1 SJ1.2
N$30: C4.1 IC4.A2
N$45: J4.A5 R13.2
N$52: J4.B5 R14.1
N$59: C43.2 J1.4
N$60: C44.2 J1.5
N$70: C32.2 J1.18
N$71: C34.2 J1.19
N$72: C35.2 J1.20
N$76: C41.2 J1.23
N$78: C42.2 J1.24
OUT+: IC4.A3 TP_OP.TP
OUT-: IC4.C3 TP_ON.TP
P0.00/XL1: C17.2 U$1.P$D2 X2.1
P0.00/XL2: C18.2 U$1.P$F2 X2.2
P0.04: U$1.P$J1
P0.09: U$1.P$L24
P0.13: C27.1 R10.1 SW1.2 U$1.P$AD8
P0.14: C28.1 R11.1 SW2.2 U$1.P$AC9
P0.19: U$1.P$AC15
P0.20: U$1.P$AD16
P0.21: U$1.P$AC17
P0.22: U$1.P$AD18
P0.23: U$1.P$AC19
P0.24: U$1.P$AD20
P0.25: U$1.P$AC21
P0.26: U$1.P$G1
P0.27: U$1.P$H2
P0.28: U$1.P$B11
P0.29: U$1.P$A10
P0.30: U$1.P$B9
P0.31: U$1.P$A8
P1.01: Q2.1 R16.1 U$1.P$W24 U$1.P$Y23
P1.02: C29.1 R12.1 SW3.2
P1.03: U$1.P$V23
P1.04: U$1.P$U24
P1.05: U$1.P$T23
P1.06: U$1.P$R24
P1.07: U$1.P$P23
P1.09: U$1.P$R1
P1.10: U$1.P$A20
P1.11: U$1.P$B19
P1.12: U$1.P$B17
P1.13: U$1.P$A16
P1.14: U$1.P$B15
P1.15: U$1.P$A14
PMIC_INT: IC3.A1 U$1.P$T2
PREVGH: C36.2 D1.1 J1.21
PREVGL: C40.2 D2.2 J1.22
RESE: J1.3 Q1.2 R6.2
RESET: J2.6 TP2.TP U$1.P$AC13
S$2: C1.2 C3.2 C10.2 C15.2 C21.2 C22.2 C26.2 C37.2 C38.2 C39.2 IC3.D2 J2.3 J2.5 R9.1 U1.1 U1.4 U1.6 U1.9
S$3: C6.1 C7.1 C8.1 C14.1 J2.1 Q2.2 R11.2 R12.2 R16.2 U$1.P$A18 U$1.P$A22 U$1.P$B1
S$4: U$1.P$B3
S$5: U$1.P$A23
SCK: J1.13 U$1.P$A12
SCL: IC1.12 IC3.B1 IC4.C1 R2.1 R4.2 TP_SCL.TP U1.7 U$1.P$M2
SDA: IC1.2 IC3.C1 IC4.B2 R1.1 R5.2 TP_SDA.TP U1.8 U$1.P$L1
SWDCLK: J2.4 TP3.TP U$1.P$AA24
SWDIO: J2.2 TP4.TP
VBAT: C26.1 C37.1 IC3.C2 TP_VBAT.TP U1.2 U1.3
VBUS: C21.1 C30.2 C31.2 C38.1 D4.5 IC3.A2 J4.A4_B9 J4.A9_B4 U$1.P$AD2
VREG: C23.1 C24.1 C39.1 IC2.A1 IC2.A2 IC2.A3 IC3.B2 TP7.TP

## Tracks (layer width: path | path; a pad name or v marks a point on that pad's centre or on a via)
3V3  (via drill 0.3)
  Top 0.127: 25.79,11.66 25.79,11.91 IC1.3 | 26.18,8.86 26.18,8.9 26.18,9.74 25.69,10.22 25.69,11.66 25.79,11.66 | 26.81,18.77 25.16,18.77 24.78,19.15 U$1.P$AD14 | 26.81,18.77 27.19,19.15 U$1.P$AD23 | 24.91,15.47 24.91,15.09 C19.1 24.91,14.96 24.14,14.96 | 24.91,15.47 24.91,16.1 24.27,16.74 22.49,16.74 20.71,18.52 20.71,19.41 21.73,20.42 U$1.P$Y2 | 24.14,14.96 23,14.96 22.62,14.58 22.62,11.28 22.24,10.9 19.95,10.9 19.57,11.28 17.29,11.28 IC2.E3 | v24.14,13.28 24.42,13.56 24.65,13.56 IC1.10 | 24.14,14.96 v24.14,14.83 | 24.91,15.47 25.67,15.47 26.18,14.96 26.18,13.69 IC1.7 26.3,13.69 26.68,13.31 26.68,11.79 26.56,11.66 25.79,11.66 | 26.81,18.77 26.81,17.75 v27.06,17.5 | v14.62,9.75 13.6,8.74 C33.1
  Top 0.152: R10.2 11.32,6.47 C33.1 | C12.1 42.34,3.2 TP1.TP 41.79,3.91 R5.1 40.65,7.8 C13.1 37.48,7.82 | R4.1 37.48,7.82 | C2.1 36.49,8.8 37.48,7.82 | C25.1 24.5,6.15 TP5.TP 25.6,8.9 26.18,8.9 32.51,8.9 C2.1 | C2.1 31.81,9.6 30.9,9.6 30.2,10.3 IC4.C2
  Bottom 0.127: v24.14,14.83 v24.14,13.28 | v27.06,17.5 27.06,13.69 25.79,12.42 25,12.42 v24.14,13.28 | v14.62,9.75 18.05,9.75 18.3,9.5 20.36,9.5 v24.14,13.28
ALERT  (via drill 0.3)
  Top 0.127: v28.46,23.09 27.83,23.09 U$1.P$J24 | v37.99,17.5 38.37,17.5 39.13,16.74 U1.5
  Bottom 0.127: v28.46,23.09 31.51,23.09 36.08,18.52 36.97,18.52 v37.99,17.5
D+  (via drill 0.3)
  Top 0.127: v24.02,18.01 23.38,18.01 22.75,18.64 U$1.P$AD6 | v24.27,29.44 24.27,31.6 23.76,32.11 D4.4
  Route15 0.127: v24.02,18.01 25.41,18.01 29.1,21.69 29.1,23.34 24.27,28.17 v24.27,29.44
D-  (via drill 0.3)
  Top 0.127: v25.79,17.5 23.51,17.5 22.24,18.77 22.24,19.15 U$1.P$AD4 | v22.62,34.01 23.64,34.01 D4.6
  Route15 0.127: v25.79,17.5 25.79,18.01 29.86,22.07 29.86,24.61 24.91,29.56 24.91,31.72 v22.62,34.01
DEC3
  Top 0.127: U$1.P$D23 27.32,24.36 27.57,24.61 29.35,24.61 29.98,23.98 C11.1
DEC4_6  (via drill 0.3)
  Top 0.127: C10.1 39.13,29.31 37.61,27.79 C15.1 37.48,27.79 37.48,26.64 36.34,25.5 L3.2 36.21,25.5 v35.57,24.87 | v29.22,24.1 27.83,24.1 U$1.P$E24 | v22.49,25.63 22.49,25.25 U$1.P$B5 | v18.3,19.66 18.3,18.77 C16.1
  Bottom 0.127: v35.57,24.87 34.81,24.1 v29.22,24.1 29.22,32.74 27.57,34.39 27.06,34.39 26.43,33.76 26.43,32.36 22.49,28.42 v22.49,25.63 18.3,21.44 v18.3,19.66
DN
  Top 0.127: J4.B7 23.64,28.42 23.64,27.79 23.51,27.66 23,27.66 22.87,27.79 22.87,28.42 J4.A7
  Top 0.152: D4.1 21.85,34.05 22.75,33.15 J4.A7
DP  (via drill 0.3)
  Top 0.127: v23.25,29.82 23.25,28.55 J4.A6 | v22.24,29.82 v22.25,29.82
  Top 0.152: D4.3 22.25,31.05 v22.25,29.82 J4.B6
  Bottom 0.127: v22.24,29.82 v23.25,29.82
EPD
  Top 0.127: 11.57,15.98 11.82,16.23 J1.15
  Top 0.152: J1.16 11.79,15.75 11.57,15.98 9.5,18.05 9.5,18.55 U$3.2
EPD_3V3
  Top 0.152: L5.1 8.46,26.45 Q2.3 10.9,27.1 14.7,23.3 14.7,20.3 C1-EP-DR.1
EPD_BUSY  (via drill 0.3)
  Top 0.127: v24.65,18.64 24.65,18.77 24.27,19.15 U$1.P$AD12 | v13.6,18.9 12.46,18.9 12.21,19.15 11.95,19.15 J1.9
  Bottom 0.127: v24.65,18.64 24.02,18.64 23.51,18.14 14.36,18.14 v13.6,18.9
EPD_CS  (via drill 0.35)
  Top 0.127: J1.12 11.15,17.75 v11,17.9
  Route2 0.127: U$1.P$K2 21.25,23.4 19.9,23.4 17.3,20.8 17.3,20 16.7,19.4 14.2,19.4 13.9,19.7 13.1,19.7 12.7,19.3 12.7,18.4 12.1,17.8 11.1,17.8 v11,17.9
  other vias: 21.75,22.9
EPD_DC  (via drill 0.3)
  Top 0.127: v26.18,15.72 26.56,16.1 26.56,17.37 25.92,18.01 24.65,18.01 23.76,18.9 23.76,19.15 U$1.P$AD10 | v13.6,18.01 12.46,18.01 12.33,18.14 11.95,18.14 J1.11
  Bottom 0.127: v26.18,15.72 15.89,15.72 v13.6,18.01
EPD_RST  (via drill 0.35)
  Top 0.127: J1.10 11.15,18.75 v10.9,19
  Route2 0.127: U$1.P$AC11 23.45,20.2 23.3,20.2 23.3,23.4 23.1,23.6 19.4,23.6 16,20.2 12.8,20.2 11.6,19 v10.9,19
  other vias: 24,19.65
GDR  (via drill 0.3)
  Top 0.127: v14.87,5.31 14.87,4.8 R8.2 | v12.59,23.21 12.21,22.83 11.95,22.83 J1.2 | v6.11,29.06 5.47,29.06 Q1.1
  Bottom 0.127: v14.87,5.31 14.87,8.1 12.59,10.39 v12.59,23.21 12.59,23.34 6.87,29.06 v6.11,29.06
GND  (via drill 0.3, 0.35)
  Top 0.127: IC1.8 25.67,13.56 25.29,13.56 IC1.9 | v26.72,9.37 27.7,9.37 28.08,9.75 IC4.B1 | v25.29,14.2 25.14,14.06 | J4.SH3 27.32,28.93 26.94,28.55 26.3,28.55 J4.A1_B12 26.18,28.42 26.18,28.04 24.91,26.77 19.95,26.77 19.82,26.64 18.75,26.64 | C9.2 30.87,22.33 30.87,23.34 U$4.2 30.87,23.47 30.11,23.47 C11.2 29.98,23.47 28.71,23.47 28.46,23.72 27.45,23.72 27.32,23.85 U$1.P$F23 27.19,23.98 26.43,23.98 26.3,24.1 U$1.P$74 | U$1.P$B7 23,24.48 22.75,24.23 | 26.3,24.23 27.57,25.5 33.8,25.5 35.19,24.1 35.19,22.96 35.06,22.83 34.94,22.83 34.56,22.45 X1.4 | 22.75,21.69 22.75,20.68 U$1.P$87 | 22.75,21.69 U$1.P$83 | 22.75,21.69 U$1.P$74 | U$1.P$79 22.75,23.09 23.25,23.6 23.25,23.72 U$1.P$74 | 22.75,24.23 U$1.P$75 | 22.75,24.23 U$1.P$74 | U$1.P$88 23.89,20.68 23.89,21.69 U$1.P$74 | U$1.P$84 24.02,21.82 U$1.P$74 | U$1.P$80 23.89,23.09 U$1.P$74 | U$1.P$76 23.89,24.1 23.38,23.6 U$1.P$74 | U$1.P$89 25.16,20.68 25.16,21.69 U$1.P$74 | U$1.P$74 25.03,21.82 U$1.P$85 25.16,21.82 26.18,21.82 U$1.P$86 26.3,21.69 26.3,20.68 U$1.P$90 26.3,20.55 27.95,18.9 27.95,16.86 27.98,16.83 | U$1.P$81 25.16,23.09 U$1.P$74 | 25.67,23.6 25.16,24.1 U$1.P$77 | 25.67,23.6 26.18,23.09 U$1.P$82 | 25.67,23.6 U$1.P$74 | 26.3,24.23 U$1.P$78 | 26.3,24.23 U$1.P$74 | 16.14,33.9 16.14,31.6 C14.2 | IC2.B1 16.14,10.52 16.4,10.52 IC2.C1 16.52,10.52 16.52,10.9 | 16.52,10.9 16.52,11.28 IC2.C3 | 16.52,10.9 IC2.C2 | 17.59,21.36 16.65,20.42 16.27,20.42 C1-EP-DR.2 | C6.2 18.43,23.47 18.43,22.71 17.41,21.69 C7.2 | C40.1 13.35,10.13 14.49,11.28 14.49,12.8 C35.1 | 24.42,4.77 24.4,4.8 23.76,4.8 21.73,6.83 20.71,6.83 20.08,6.2 C29.2
  Top 0.152: U$3.1 8.54,19.9 8,19.9 7.8,19.7 7.8,19.1 8.2,18.7 8.4,18.7 8.85,18.25 C32.1 | C40.1 13.3,10 12.25,8.95 C33.2 11.55,8 C27.2 | SW1.1 14.55,3.87 R8.1 17.38,4.22 TP6.TP | TP6.TP TP_BAT_GND.TP | TP6.TP 19.49,6.09 C29.2 18.85,7.28 C24.2 17.95,9.8 17.3,9.8 17.3,9.75 C23.2 16.5,8.95 IC2.C1 | SW3.1 24.4,4.75 24.42,4.77 C25.2 29.99,6 C2.2 | C2.2 34,7.8 34.95,6.85 C28.2 | C28.2 34.95,4.42 SW2.1 35.45,4.03 R7.1 39.9,3.22 39.9,1.4 40.05,1.25 C12.2 | C28.2 36.05,7.4 C13.2 | D3.1 4.31,33.76 SJ1.1 12.34,33.9 16.14,33.9 17.98,33.9 J4.SH2 | C1-EP-DR.2 16.05,20.09 16.05,14.6 C17.1 16.55,13.53 R13.1 | R13.1 16.93,13.2 C18.1 | R13.1 16.75,13.18 R14.2 | R14.2 15.4,13.75 C35.1 C34.1 14.55,15.75 14,16.3 13.4,16.3 12.35,15.25 J1.17 11.25,15.25 11,15.5 11,16 10.3,16.7 9.85,16.7 C32.1 | R14.2 16.5,13.43 IC2.C3 | D4.2 18.78,33.1 J4.SH2 | J4.SH2 J4.SH4 19.25,28.48 J4.A12_B1 18.75,27.42 18.75,26.64 C5.2 C8.2 18.75,23.7 C6.2 | C31.1 25.95,31.7 C30.1 26.57,32.45 J4.SH1 | J1.MP2 9.18,11.97 C41.1 8.95,14 C36.1 8.95,14.4 8.95,15.6 C32.1 | U$3.1 9.1,20.45 C44.1 10.45,20.45 11.2,19.7 11.78,19.7 J1.8 12.5,19.75 C43.1 | J1.MP1 8.5,23.37 8.5,20.05 U$3.1 | C7.2 17.59,21.36 18.75,20.2 C16.2 | IC4.B3 28.5,11.2 30.5,11.2 33.2,13.9 C4.2 U$5.2 33.26,16.8 32.16,15.7 28.05,15.7 27.25,16.5 C20.2 27.75,16.6 27.98,16.83 28.05,16.9 31.77,16.9 31.77,22.57 32.38,23.18 32.48,23.18 32.88,23.57 X1.2 33.17,23.57 | C2.2 29.5,7.8 v29.4,7.7 | 34.23,22.73 X1.4 | R3.1 24.82,14.38 25.14,14.06 25.25,13.95 IC1.9 | IC1.8 25.75,14.71 C19.2
  Bottom 0.127: v26.72,9.37 25.92,9.37 23.76,11.53 23.76,11.79 24.14,12.17 25.92,12.17 27.57,13.82 27.57,18.01 | 27.57,18.01 27.57,19.28 26.3,20.55 U$1.P$90 | v25.29,14.2 26.68,15.6 26.68,17.25 26.56,17.37 26.56,17.63 26.94,18.01 27.57,18.01 | J4.SH1 27.32,33.12 J4.SH3 27.32,28.93 27.32,25.25 26.3,24.23 U$1.P$78
GND3
  Top 0.127: IC1.1 24.78,11.91 24.78,11.53 24.4,11.15 23.89,11.15 23,12.04 23,13.82 R3.2
HAPTIC_EN  (via drill 0.3)
  Top 0.127: v24.14,16.23 22.62,16.23 20.46,18.39 20.46,20.29 21.22,21.06 U$1.P$U1 | v27.19,12.8 27.19,11.88 26,10.7 26.92,9.78 27.58,9.78 IC4.A1
  Route15 0.127: v24.14,16.23 27.19,13.18 v27.19,12.8
IMU_INT1  (via drill 0.3)
  Top 0.127: U$1.P$N1 20.4,22.15 20.11,21.86 20.11,17.73 v22.62,15.21 | v25.67,12.93 26.02,12.57 26.26,12.57 IC1.5
  Bottom 0.127: v22.62,15.21 23.89,15.21 24.02,15.34 24.27,15.34 24.78,14.83 24.78,13.82 v25.67,12.93
IMU_INT2  (via drill 0.35)
  Route2 0.127: U$1.P$P2 21.55,21.7 20.2,21.7 19.9,21.4 19.9,18.6 22.6,15.9 23.5,15.9 24,15.4 25.3,15.4 26.27,14.43 IC1.6
  other vias: 21.75,21.9 26.27,13.05
LX1  (via drill 0.35)
  Top 0.127: IC2.B2 16.14,10.9 16.14,11.28 IC2.B3
  Top 0.152: IC2.B3 16.1,11.6 15.7,12 v15.4,12 | L1.1 19.97,13.83 v19.1,14.7
  Bottom 0.152: v15.4,12 18.1,14.7 v19.1,14.7
LX2
  Top 0.127: IC2.D2 16.9,11.28 IC2.D3 16.9,11.4 17.16,11.66 21.09,11.66 L1.2
MOSI  (via drill 0.35)
  Top 0.127: J1.14 11.45,16.75 9.8,18.4 v9.8,19.1
  Route2 0.127: U$1.P$B13 22.95,25.15 22.6,24.8 22.1,24.8 21.2,23.9 18.7,23.9 v16,21.2
  Route15 0.127: v9.8,19.1 11.9,21.2 v16,21.2
  other vias: 24.5,25.15
N$1
  Top 0.127: U$1.P$C1 21.22,24.74 20.46,24.74 19.32,25.88 C5.1
N$3
  Top 0.127: U$1.P$AC5 21.98,19.66 21.86,19.53 21.6,19.53 20.97,18.9 20.97,18.64 22.62,16.99 25.54,16.99 25.92,16.61 C20.1
N$4
  Top 0.152: ANT1.1 44.25,27.7 42.6,29.35 U$2.2 42.86,29.66 C1.1 42.86,30.52 42.16,31.23 C22.1
N$5
  Top 0.152: U$2.1 41.6,26.76 C3.1
N$6
  Top 0.127: L2.2 34.94,26.39 36.21,26.39 L3.1
N$10  (via drill 0.3)
  Top 0.127: v18.43,10.01 18.3,10.13 17.16,10.13 16.9,10.39 16.9,10.52 IC2.D1 | v23.64,13.94 23.64,13.05 23.25,12.67 23.25,12.29 23.64,11.91 R2.2
  Bottom 0.127: v18.43,10.01 19.7,10.01 v23.64,13.94
N$11
  Top 0.152: C1-EP-DR1.2 2.35,30.8 L5.2 7.45,24.7 7.45,17.2 D1.2
N$12
  Top 0.152: IC2.E1 21,10.5 22.4,9.1 24.4,9.1 R1.2
N$13
  Top 0.152: C1-EP-DR1.1 4,31.25 Q1.3 7.87,31.25 D2.1 7.22,32.5 D3.2
N$14
  Top 0.127: U$1.P$N24 27.83,22.2 30.24,22.2 C9.1
N$16  (via drill 0.3)
  Top 0.127: v38.49,18.39 38.37,18.52 36.59,18.52 IC3.D1 | v39.38,19.28 39.38,19.79 39.89,20.29 R9.2
  Bottom 0.127: v39.38,19.28 v38.49,18.39
N$21
  Top 0.127: U$1.P$B24 27.83,25.12 29.73,25.12 30.87,23.98 U$4.1 31,23.98 31.51,24.48 33.8,24.48 34.43,23.85 34.43,23.6 X1.1
N$22
  Top 0.152: SJ1.2 11.8,32.64 9.61,32.64 R6.1
N$30
  Top 0.152: IC4.A2 27.5,10.2 26.9,10.2 26.4,10.7 27.5,11.8 30.4,11.8 31.95,13.35 C4.1
N$45  (via drill 0.3)
  Top 0.127: v20.59,16.36 20.08,15.85 19.57,15.85 18.55,14.83 18.55,12.93 18.3,12.67 16.9,12.67 R13.2 | v23.76,27.28 24.14,27.66 24.14,28.42 J4.A5
  Bottom 0.127: v20.59,16.36 23,16.36 25.16,18.52 25.16,18.77 24.02,19.91 22.49,19.91 20.21,22.2 20.21,22.83 22.49,25.12 22.62,25.12 23.76,26.26 v23.76,27.28
N$52  (via drill 0.3)
  Top 0.127: v15.38,18.64 15.38,15.09 R14.1 | v19.19,30.45 20.08,30.45 21.22,29.31 21.22,28.55 J4.B5
  Bottom 0.127: v15.38,18.64 15.38,27.41 18.43,30.45 v19.19,30.45
N$59
  Top 0.127: J1.4 11.95,21.82 13.09,21.82 C43.2
N$60
  Top 0.127: J1.5 11.82,21.31 10.81,21.31 10.43,21.69 C44.2
N$70
  Top 0.152: C32.2 11.1,14.75 J1.18
N$71
  Top 0.152: J1.19 13.1,14.25 C34.2
N$72
  Top 0.152: J1.20 12.4,13.75 C35.2
N$76
  Top 0.152: C41.2 11.78,12.2 J1.23
N$78
  Top 0.152: C42.2 11.82,11.28 J1.24
OUT+  (via drill 0.35)
  Top 0.152: TP_OP.TP 29.5,13.7 30.4,13.7 v30.6,13.5 | v27.9,11.3 27.6,11 IC4.A3
  Route15 0.152: v30.6,13.5 28.4,11.3 v27.9,11.3
OUT-
  Top 0.152: TP_ON.TP 33,10.8 IC4.C3
P0.00/XL1
  Top 0.127: U$1.P$D2 21.73,24.36 21.09,24.36 19.19,22.45 19.19,18.39 18.94,18.14 17.92,18.14 16.9,17.12 X2.1 16.9,16.99 17.03,16.86 17.03,14.2 C17.2
P0.00/XL2
  Top 0.127: U$1.P$F2 21.73,23.98 21.09,23.98 19.44,22.33 19.44,17.12 X2.2 19.32,16.99 18.17,15.85 18.17,13.31 C18.2
P0.13  (via drill 0.3)
  Top 0.127: v23.38,18.64 23.25,18.77 U$1.P$AD8 | v13.6,7.85 13.09,7.85 10.94,5.69 10.9,5.69
  Top 0.152: C27.1 10,7.25 10,6.3 10.38,5.93 R10.1 10.9,5.69 10.9,4.17 SW1.2
  Route15 0.127: v23.38,18.64 23.38,17.63 v13.6,7.85
P0.14  (via drill 0.3, 0.35)
  Top 0.127: v14.49,25.5 14.74,25.5 15,25.25 15,24.74 16.27,23.47 R11.1 | v26.43,5.56 32.14,5.56 32.52,5.18 32.6,5.18
  Top 0.152: SW2.2 32.6,5.18 32.6,5.25 C28.1
  Route2 0.127: R11.1 15.9,22.98 v15.9,22.1
  Route15 0.127: v15.9,22.1 18.2,22.1 20.65,19.65 U$1.P$AC9
  Bottom 0.127: v14.49,25.5 14.49,20.42 13.09,19.02 13.09,10.64 17.92,5.82 26.18,5.82 v26.43,5.56
  other vias: 23.5,19.65 16.3,23.38
P1.01  (via drill 0.3)
  Top 0.127: U$1.P$Y23 27.32,20.42 27.57,20.68 27.7,20.68 U$1.P$W24 27.83,20.68 28.21,21.06 v28.21,21.69 | v15.89,24.48 16.01,24.61 16.02,24.61
  Top 0.152: Q2.1 13,27.62 16.01,24.61 16.3,24.32 R16.1
  Route15 0.127: v28.21,21.69 28.21,21.95 26.56,23.6 16.78,23.6 v15.89,24.48
P1.02  (via drill 0.3)
  Top 0.127: v13.98,24.74 14.11,24.87 14.49,24.87 R12.1 | v19.32,5.31 21.6,5.31
  Top 0.152: SW3.2 21.6,5.31 21.6,6.1 C29.1
  Bottom 0.127: v13.98,24.74 13.98,23.98 12.84,22.83 12.84,10.52 18.05,5.31 v19.32,5.31
PMIC_INT  (via drill 0.35)
  Top 0.127: IC3.A1 34.1,18.5 v33.5,19.1 | U$1.P$T2 20.9,21.4 v20.6,21.1
  Route2 0.127: v33.5,19.1 33.4,19.2 22.1,19.2 20.6,20.7 v20.6,21.1
PREVGH
  Top 0.127: D1.1 8.01,13.31 8.01,10.52 9.03,9.5 9.92,9.5 10.05,9.63 10.05,11.28 9.66,11.66 9.66,12.93 10.68,13.94 C36.2
  Top 0.152: C36.2 11.1,13.55 11.1,13.4 11.25,13.25 J1.21
PREVGL  (via drill 0.3)
  Top 0.127: v8.27,27.02 8.27,28.04 D2.2 | v10.68,13.18 10.94,13.18 11.32,12.8 11.82,12.8 J1.22
  Top 0.152: C40.2 12.6,12.05 12.6,12.4 12.25,12.75 J1.22
  Bottom 0.127: v8.27,27.02 8.27,15.6 v10.68,13.18
RESE  (via drill 0.3)
  Top 0.127: v10.17,27.41 10.17,23.6 11.44,22.33 11.82,22.33 J1.3 | v9.28,28.3 9.28,28.68 8.74,29.22
  Top 0.152: R6.2 9.03,29.5 8.74,29.22 8.68,29.15 Q1.2
  Bottom 0.127: v9.28,28.3 v10.17,27.41
RESET  (via drill 0.35)
  Top 0.127: TP2.TP 39,31.34 38.75,31.09 36.59,31.09 36.21,31.47 35.7,31.47 J2.6 35.19,32.03 33.76,32.2 33.1,32.2 33.5,32.6 33.5,34.3 33,34.8 30.8,34.8 30.2,34.2 30.2,32.4 v30.4,32.2
  Route15 0.127: v30.4,32.2 30.4,20.8 30.25,20.65 v30.25,19.85 | v29,16.3 25.4,16.3 v25.2,16.5
  Bottom 0.127: v30.25,19.85 30.25,17.45 29.1,16.3 v29,16.3 | v25.2,16.5 25.2,18.1 25.6,18.5 25.6,19 24.95,19.65 U$1.P$AC13
  other vias: 24.5,19.65
S$1
  pour Route2: 31.56,1.86 31.58,1.88 36.42,1.88 36.44,1.86 36.46,1.84 36.48,1.82 36.48,0.08 39,0.08 39.78,0.12 40.54,0.25 41.29,0.46 42,0.76 42.68,1.14 43.32,1.59 43.9,2.1 44.41,2.68 44.86,3.32 45.24,4 45.54,4.71 45.75,5.46 45.88,6.22 45.92,7 45.92,28 45.88,28.78 45.75,29.54 45.54,30.29 45.24,31 44.86,31.68 44.41,32.32 43.9,32.9 43.32,33.41 42.68,33.86 42,34.24 41.29,34.54 40.54,34.75 39.78,34.88 39,34.92 7,34.92 6.22,34.88 5.46,34.75 4.71,34.54 4,34.24 3.32,33.86 2.68,33.41 2.1,32.9 1.59,32.32 1.14,31.68 0.76,31 0.46,30.29 0.25,29.54 0.12,28.78 0.08,28 0.08,24.48 7.02,24.48 7.04,24.46 7.06,24.44 7.08,24.42 7.08,10.58 7.06,10.56 7.04,10.54 7.02,10.52 0.08,10.52 0.08,7 0.12,6.22 0.25,5.46 0.46,4.71 0.76,4 1.14,3.32 1.59,2.68 2.1,2.1 2.68,1.59 3.32,1.14 4,0.76 4.71,0.46 5.46,0.25 6.22,0.12 7,0.08 9.52,0.08 9.52,1.82 9.54,1.84 9.56,1.86 9.58,1.88 14.42,1.88 14.44,1.86 14.46,1.84 14.48,1.82 14.48,0.08 20.52,0.08 20.52,1.82 20.54,1.84 20.56,1.86 20.58,1.88 25.42,1.88 25.44,1.86 25.46,1.84 25.48,1.82 25.48,0.08 31.52,0.08 31.52,1.82 31.54,1.84
S$2
  Top 0.152: J2.3 J2.5 36.22,30.8 37.4,30.8 38.34,29.86 C10.2 40.2,29.86 C22.2 41.64,31 C1.2 42.1,30.05 42.1,28.6 42.8,27.9 42.8,26.7 42.25,26.14 C3.2 41.5,26.14 39.84,27.8 C15.2 41.9,24.75 C39.2 42.85,21.9 44.2,21.9 44.8,21.3 C21.2 44.95,20.25 C38.2 44.95,17.8 C37.2 44.85,15.6 C26.2 44.75,15.35 45.3,14.8 45.3,14.4 45.6,14.1 45.6,12.8 44.9,12.1 42.2,12.1 41.19,13.12 U1.1 40.85,15.15 40.2,15.8 U1.9 39.95,16.15 U1.6 39.61,16.15 40.11,16.65 U1.4 38.94,18.9 IC3.D2 36.62,18.9 38.02,20.3 R9.1
S$3  (via drill 0.3)
  Top 0.127: J2.1 33.03,30.2 32.91,30.07 31.26,30.07 26.81,25.63 U$1.P$A22 26.68,25.63 26.3,26.01 26.18,26.01 25.79,25.63 U$1.P$A18 25.67,25.63 25.67,25.76 25.16,26.26 v24.27,26.26 | v20.71,25.25 21.22,25.25 U$1.P$B1 | v18.3,24.36 18.17,24.36 18.14,24.39 | C14.1 14.74,31.47 13.09,29.82 Q2.2 | R11.2 16.4,22.83 17.16,23.6 C6.1
  Top 0.152: C6.1 18.14,24.39 18.25,24.5 C8.1 18.02,24.77 16.6,24.77 R16.2 16.5,26.35 Q2.2 | R12.2 14.6,24.32 16.1,22.82 R11.2 16.3,22.4 16.5,22.2 16.5,21.95 C7.1 16.84,21.9
  Route15 0.127: v24.27,26.26 21.73,26.26 v20.71,25.25
  Bottom 0.127: v20.71,25.25 19.19,25.25 v18.3,24.36
S$4
  Top 0.152: 21.95,25.15 U$1.P$B3
SCK  (via drill 0.3)
  Top 0.127: v19.82,26.14 23.76,26.14 24.27,25.63 U$1.P$A12 | v13.98,23.34 13.98,19.15 14.11,19.02 14.11,17.88 13.6,17.37 11.95,17.37 J1.13
  Route15 0.127: v19.82,26.14 16.65,26.14 13.98,23.47 v13.98,23.34
SCL  (via drill 0.3, 0.35)
  Top 0.127: v29.1,9.75 28.71,9.75 IC4.C1 | 24.27,12.55 v24.27,11.66 | v33.92,14.58 34.94,14.58 35.19,14.83 TP_SCL.TP
  Top 0.152: U1.7 37.45,15.65 36.92,15.12 R4.2 TP_SCL.TP 35.3,17.9 35.8,18.4 IC3.B1 | v23.7,12.47 23.77,12.55 24.27,12.55 IC1.12
  Route2 0.127: U$1.P$M2 21.25,22.4 20.85,22 20,22 19.4,21.4 19.4,16.77 v23.7,12.47
  Bottom 0.127: v24.27,11.66 25.03,10.9 26.23,10.9 27.37,9.75 v29.1,9.75 v33.92,14.58
  other vias: 21.75,22.4
SDA  (via drill 0.3, 0.35)
  Top 0.127: IC1.2 25.19,11.96 v25.19,11.4 25.19,11.06 R1.1 24.73,10.28 25.1,9.9 v25.1,9.4 | v20.71,22.71 21.22,22.71 U$1.P$L1 | v36.08,18.01 36.08,18.26 36.21,18.39 36.21,18.52 IC3.C1 | v37.99,15.21 39.13,15.21 U1.8 | v27.1,10.7 27.1,10.6 27.2,10.5 27.9,10.5 IC4.B2
  Top 0.152: TP_SDA.TP 43.84,9.46 R5.2 39.22,11.86 U1.8
  Route15 0.127: v25.1,9.4 26.4,10.7 v27.1,10.7
  Bottom 0.127: v20.71,22.71 21.48,22.71 22.36,23.6 27.32,23.6 32.91,18.01 33.03,18.01 | 33.03,18.01 v36.08,18.01 37.99,16.1 v37.99,15.21 | v25.19,11.4 26.43,11.4 33.03,18.01
SWDCLK  (via drill 0.3)
  Top 0.127: U$1.P$AA24 27.83,20.17 29.35,20.17 31.38,22.2 31.38,23.09 32.52,24.23 33.67,24.23 33.8,24.1 33.8,21.95 34.05,21.69 35.06,21.69 35.45,22.07 35.45,24.36 34.43,25.37 34.43,26.77 33.54,27.66 33.54,29.82 33.8,30.07 33.8,30.96 34.3,31.47 J2.4 34.43,31.47 34.81,31.09 v35.06,31.09 | v37.1,33.25 37.48,33.63 38.97,33.63 TP3.TP
  Bottom 0.127: v37.1,33.25 35.06,31.22 v35.06,31.09
SWDIO
  Top 0.127: J2.2 33.03,31.6 31,31.6 29.48,30.07 TP4.TP
VBAT
  Top 0.127: IC3.C2 36.21,19.02 37.86,20.68 40.53,20.68 43.45,17.75 C37.1
  Top 0.152: C26.1 44.25,13.7 TP_VBAT.TP 42.6,15 41.95,15.65 U1.2 U1.3 42.85,16.15 43.55,16.85 C37.1
VBUS  (via drill 0.3)
  Top 0.127: IC3.A2 35.32,18.9 35.32,19.53 v36.72,20.93 43.19,20.93 43.7,20.42 C21.1 | v21.48,18.77 21.48,18.9 21.73,19.15 U$1.P$AD2 | v19.7,27.15 20.59,28.04 20.59,28.42 J4.A9_B4 | v28.97,33.63 28.9,33.63
  Top 0.152: C21.1 43.8,19.15 C38.1 | D4.5 24.55,33.1 C30.2 25.95,34.5 28.3,34.5 28.9,33.9 28.9,33.63 28.9,32.75 C31.2 27.85,31.45 26.8,30.4 25,30.4 24.8,30.2 24.8,29.5 24.9,29.4 25.1,29.4 25.4,29.1 J4.A4_B9
  Bottom 0.127: v21.48,18.77 18.55,18.77 17.79,19.53 17.79,25.25 v19.7,27.15 19.7,27.91 26.43,34.64 27.7,34.64 28.84,33.5 | v36.72,20.93 36.72,24.48 33.41,27.79 33.41,28.93 32.27,30.07 31.51,30.07 29.48,32.11 29.48,32.87 28.84,33.5 | 28.84,33.5 v28.97,33.63
VREG  (via drill 0.3)
  Top 0.127: v35.83,19.41 35.83,18.9 IC3.B2 | v37.86,21.44 41.8,21.44 C39.1 | v18.3,8.1 17.55,8.1 17.54,8.1
  Top 0.152: C24.1 17.55,8.1 17.55,6.85 TP7.TP 17.05,6.8 C23.1 15.05,9.85 IC2.A1 IC2.A2 IC2.A3
  Bottom 0.127: v37.86,21.44 36.34,19.91 | 36.34,19.91 v35.83,19.41 | 36.34,19.91 38.49,17.75 38.49,15.09 32.52,9.12 27.7,9.12 26.68,8.1 v18.3,8.1
(copper drawn outside any net)
  shapes: Bottom area x1